# Altium PCB mada7.PcbDoc (part 1 of 3)
Units mil, origin at the board's own origin, x right, y up, seen from the top; angles counter-clockwise.
Board outline 3925 x 3925 mil, 2 copper layers (TopLayer, BottomLayer); 71 components, 72 nets, 888 pads, 9 vias.
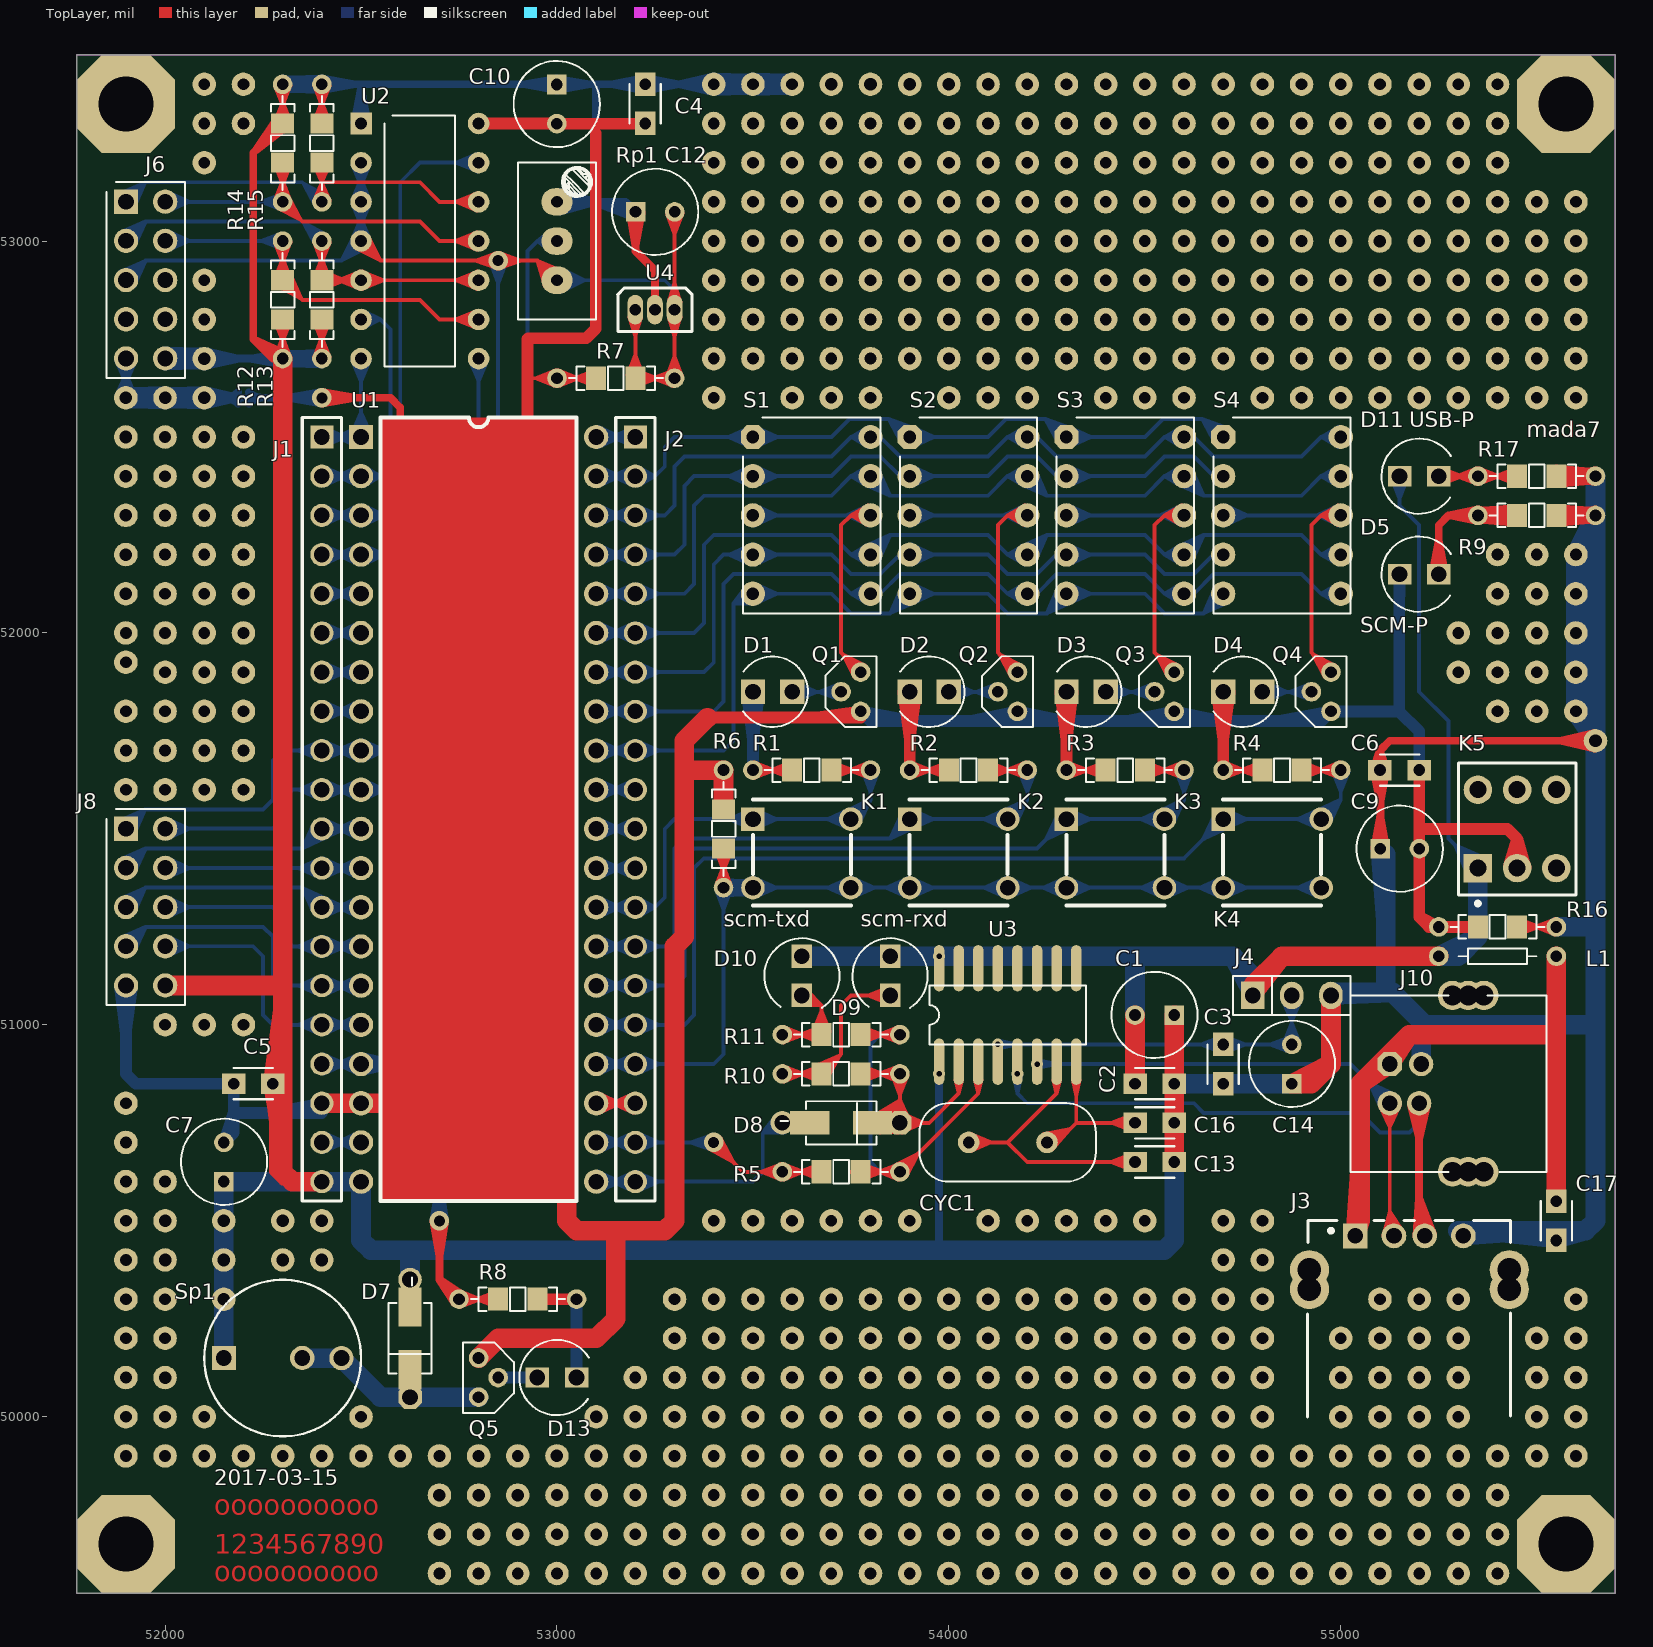
[diagram p0: TopLayer view]
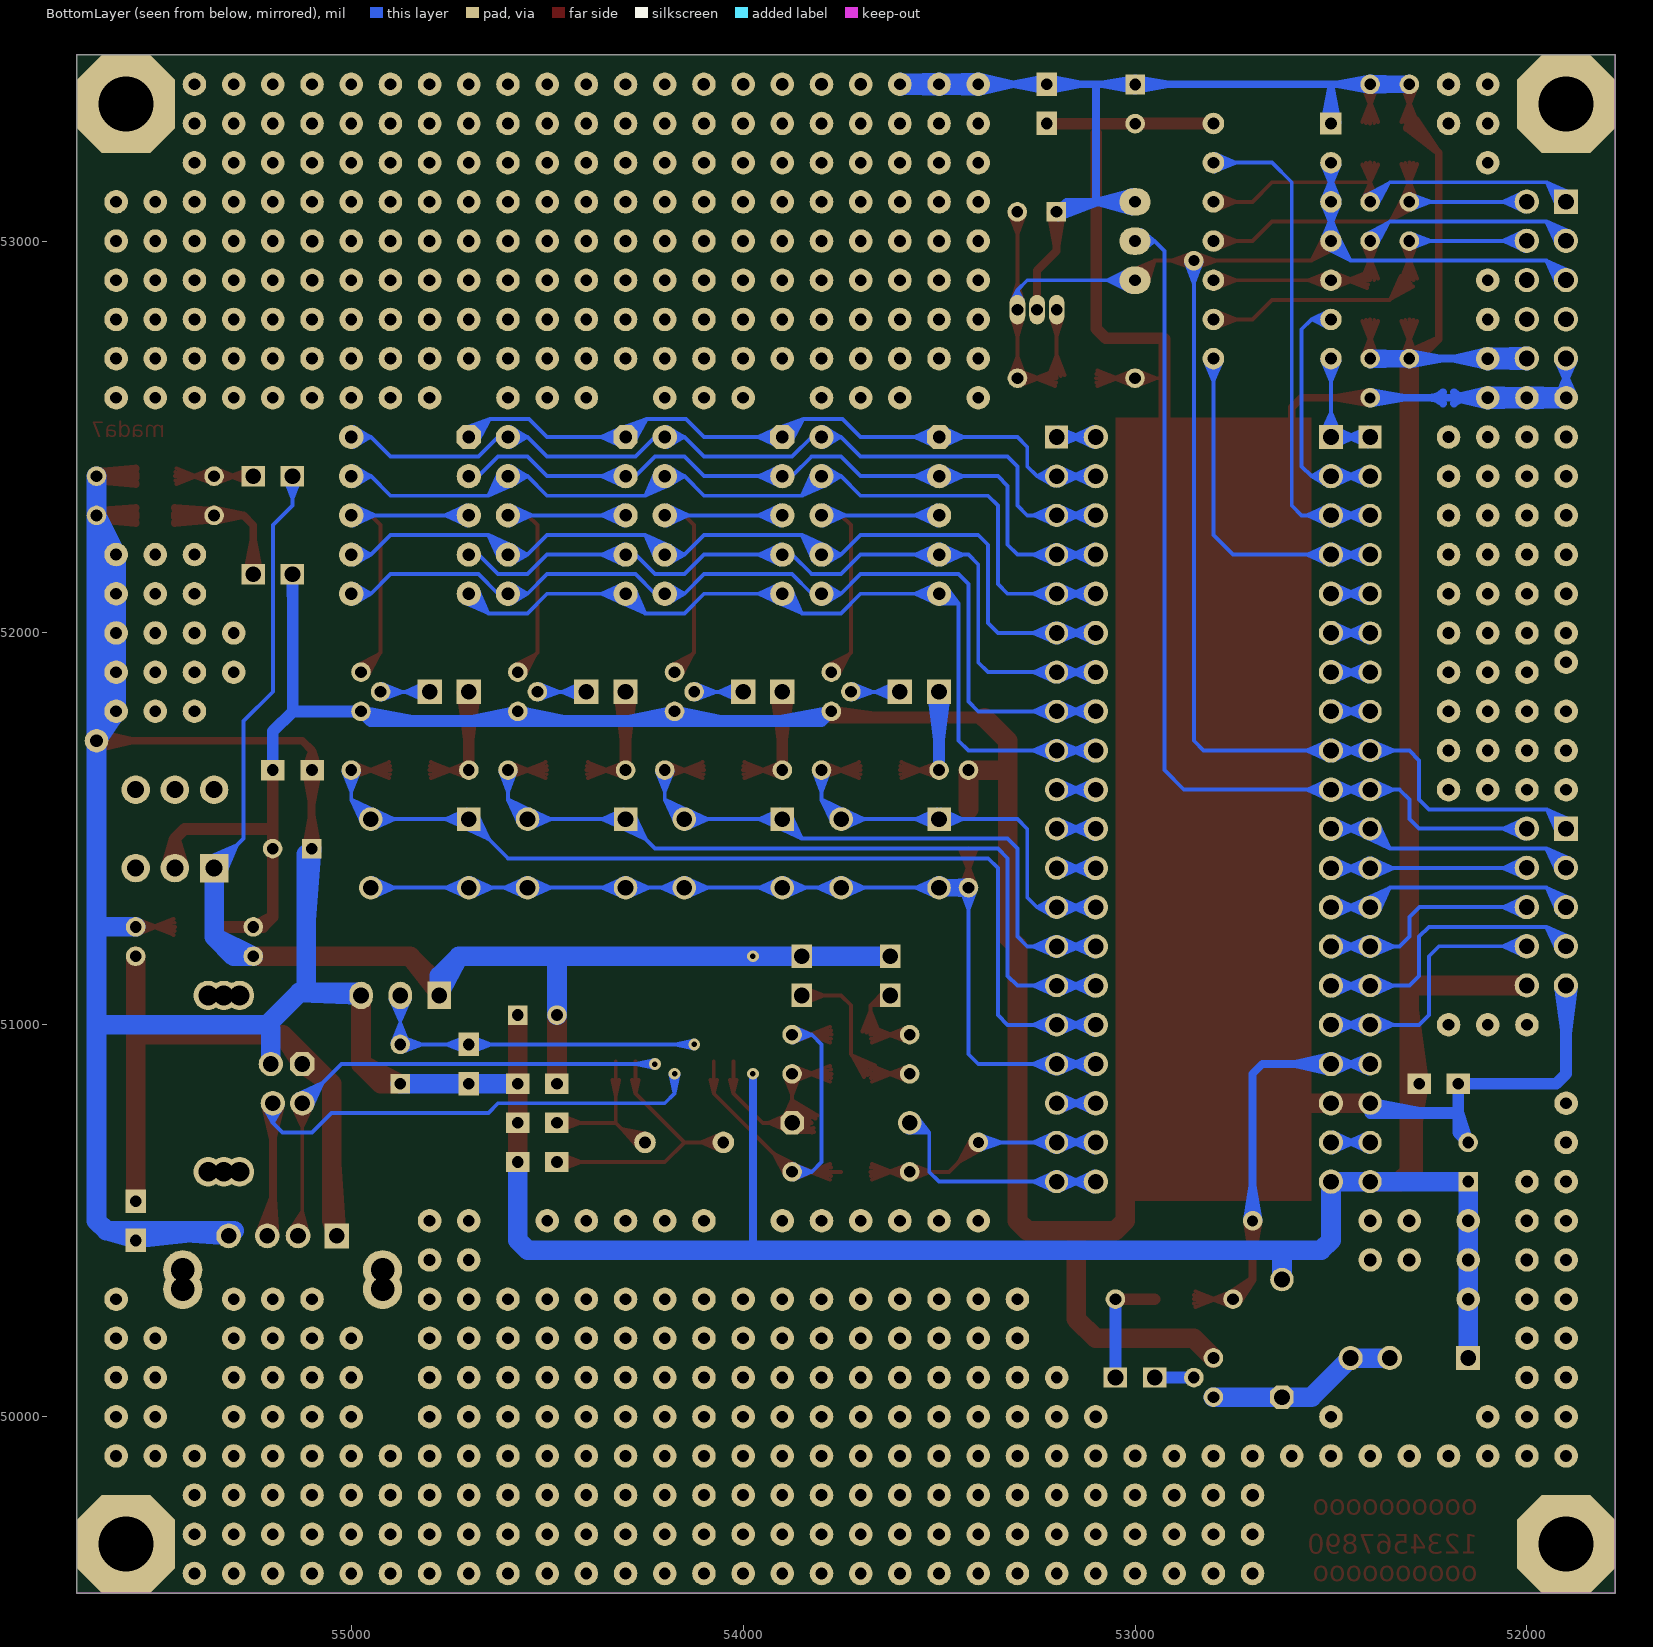
[diagram p1: BottomLayer view, seen from below]

## Layer stack, top to bottom
TopLayer: signal copper 1.4
Dielectric: dielectric 12.6, FR-4, Dk 4.8
BottomLayer: signal copper 1.4

## Board outline
51775,53475 55700,53475 55700,49550 51775,49550

## Design rules (kind name [scope] priority, off if disabled: settings)
AssemblyTestPointUsage [All] p1 off:
AssemblyTestpoint [All] p1 off: testpointundercomponent=TRUE minsize=40 maxsize=100 preferedsize=60 minholesize=0 maxholesize=40 preferedholesize=32 testpointgrid=1 usegrid=TRUE gridtolerance=0.01 allowsidetop=TRUE allowsidebottom=TRUE
Clearance [All] p1: gap=10
ComponentClearance [All] p1 off: gap=10 collisioncheckmode=3 verticalgap=10 showdistances=FALSE
FabricationTestPointUsage TestPointUsage [All] p1 off: valid=0 allowmultiple=FALSE
FabricationTestpoint Testpoint [All] p1 off: side=3 testpointundercomponent=TRUE minsize=40 maxsize=100 preferedsize=60 minholesize=20 maxholesize=40 preferedholesize=32 testpointgrid=1 allowsidetop=TRUE allowsidebottom=TRUE usegrid=TRUE gridtolerance=0.01
Height [All] p1 off: minheight=0 maxheight=1000 prefheight=500
HoleToHoleClearance [All] p1 off: gap=10 allowstackedmicrovias=TRUE
LayerPairs [All] p1 off: enforce=TRUE
MinimumSolderMaskSliver [All] p1 off: minsoldermaskwidth=10
NetAntennae [All] p1 off: netantennaetolerance=0
PasteMaskExpansion [All] p1 off: expansion=0
PlaneClearance [All] p1 off: clearance=20
PlaneConnect [All] p1 off: planeconnectstyle=Relief reliefexpansion=20 reliefentries=4 reliefconductorwidth=10 reliefairgap=10
PolygonConnect [All] p1 off: connectstyle=Relief reliefconductorwidth=10 reliefentries=4 polygonreliefangle="90 Angle"
RoutingVias [All] p1: holewidth=28 width=50 viastyle="Through Hole" minholewidth=28 minwidth=50 maxholewidth=28 maxwidth=50
SilkToSilkClearance [All] p1 off: silktosilkclearance=10
SilkscreenOverComponentPads [All] p1 off: minsilkscreentomaskgap=10
SolderMaskExpansion [All] p1 off: expansion=4
Width [All] p1: maxlimit=100 minlimit=10 preferedwidth=10
Width Width_1 [All] p2 off: maxlimit=100 minlimit=10 preferedwidth=50
Width Width_2 [All] p3 off: maxlimit=100 minlimit=10 preferedwidth=30
13 further rules are at their usual default settings.

## Components (designator, comment, footprint, x,y, rotation, side; value= is the part's Value field where it differs from the comment)
C1 "100u/16v" rb.1/.2#1 54525,51025 r0 top
C2 "CAP" cap010805 54475,50850 r0 top
C3 "103" cap010805 54700,50950 r270 top
C4 "104" cap010805 53225,53300 r90 top
C5 "104" cap010805 52175,50850 r0 top
C6 "104" cap010805 55200,51650 r180 top
C7 "10u/16v" rb.1/.2#1 52150,50650 r270 top
C9 "100u/16v" rb.1/.2#2 55150,51450 r180 top
C10 "10u/16v" rb.1/.2#2 53000,53350 r90 top
C12 "10u" rb.1/.2#2 53250,53075 r180 top
C13 "104" cap010805 54475,50650 r0 top
C14 "10u/16v" rb.1/.2#1 54875,50900 r270 top
C16 "" cap010805 54475,50750 r0 top
C17 "104" cap010805 55550,50550 r270 top
CYC1 "12Mhz" cyc-rad 54250,50700 r180 top
D1 "LED" led-3 53550,51850 r180 top
D2 "LED" led-3 53950,51850 r180 top
D3 "LED" led-3 54350,51850 r180 top
D4 "LED" led-3 54750,51850 r180 top
D5 "LED" led30805 55200,52150 r0 top
D7 "sma03" smc03 52625,50050 r90 top
D8 "sma03" smc03 53875,50750 r180 top
D9 "LED" led30805 53850,51125 r270 top
D10 "LED" led30805 53625,51125 r270 top
D11 "LED" led30805 55200,52400 r0 top
D13 "LED" led30805 53000,50100 r0 top
J1 "Header 20" HDR1X20 52400,52500 r270 top
J2 "Header 20" HDR1X20 53200,52500 r270 top
J3 "USB-a" usb-a 55175,50350 r270 top
J4 "Header 20" SIP3 54875,51075 r0 top
J6 "CON10" idc10 51900,53100 r270 top
J8 "CON10" idc10 51900,51500 r270 top
J10 "" USB_b 55125,50900 r90 top
K1 "6-6-5" pb1 53500,51525 r0 top
K2 "6-6-5" pb1 53900,51525 r0 top
K3 "6-6-5" pb1 54300,51525 r0 top
K4 "6-6-5" pb1 54700,51525 r0 top
K5 "SW-DPDT" DPDT-6 55450,51500 r90 top
L1 "Res2" axial0.3 55550,51175 r180 top
Q1 "8550" to-92a 53775,51800 r90 top
Q2 "8550" to-92a 54175,51800 r90 top
Q3 "8550" to-92a 54575,51800 r90 top
Q4 "8550" to-92a 54975,51800 r90 top
Q5 "8550" to-92a 52800,50150 r270 top
R1 "Res22" a030805 53800,51650 r180 top
R2 "Res22" a030805 54200,51650 r180 top
R3 "Res22" a030805 54600,51650 r180 top
R4 "Res22" a030805 55000,51650 r180 top
R5 "Res22" a030805 53875,50625 r180 top
R6 "Res22" a030805 53425,51350 r90 top
R7 "Res22" a030805 53300,52650 r180 top
R8 "Res22" a030805 53050,50300 r180 top
R9 "Res22" a030805 55650,52300 r180 top
R10 "Res22" a030805 53875,50875 r180 top
R11 "Res22" a030805 53875,50975 r180 top
R12 "Res22" a030805 52300,52700 r90 top
R13 "Res22" a030805 52400,52700 r90 top
R14 "Res22" a030805 52300,53400 r270 top
R15 "Res22" a030805 52400,53400 r270 top
R16 "Res22" a030805 55250,51250 r0 top
R17 "Res22" a030805 55650,52400 r180 top
Rp1 "10k" VR3296-1 53000,53000 r90 top
S1 "3911BH" LED10s 53500,52500 r0 top
S2 "3911BH" LED10s 53900,52500 r0 top
S3 "3911BH" LED10s 54300,52500 r0 top
S4 "3911BH" LED10s 54700,52500 r0 top
Sp1 "SPEAKER" sp0.23 52150,50150 r0 top
U1 "单片机IAP15F2K61S2" DIP40 52500,52500 r0 top
U2 "TLC5620" dip14 52500,53300 r0 top
U3 "CH340G" SOP-16 53950,51025 r0 top
U4 "TL431AILP" BCY-W3/B.8 53250,52825 r270 top

## Footprints (in the part's own frame and the unit in brackets; to place one, negate y for a bottom-side part, rotate by r counter-clockwise, add the part's x,y. Pads: shape width x height; smd on the part's side, far side on the other; paste and mask are expansions set on the pad)
a030805 [mm]
  round 1.27 hole 0.762: 1(0,0) 2(7.62,0)
  rect 1.3x1.5 smd: 3(2.54,0) 4(5.08,0)
  silkscreen extent 0.76,-0.76 6.86,0.76
axial0.3 [mil]
  round 50 hole 30: 1(0,0) 2(300,0)
  silkscreen extent 50,-20 250,20
BCY-W3/B.8 [mil] "TO, Flat Index; 3 In-Line, Axial Leads; Body Dia. 4.6mm; Lead Dia. 0.5 mm (max)"
  oval 75x40 hole 30: 1(0,-50) 2(0,0) 3(0,50)
  silkscreen extent -56,-95 56,95
cap010805 [mil] "0.1&0805"
  rect 60x52 hole 30: 1(0,0) 2(100,0)
  silkscreen extent 0,-40 100,40
cyc-rad [mil]
  round 55 hole 30: 1(-0.45,-0.07) 2(199.55,-0.07)
  silkscreen extent -125,-100 325,100
dip14 [mil]
  rect 55x55 hole 30: 1(0,0)
  round 55 hole 30: 2(0,-100) 3(0,-200) 4(0,-300) 5(0,-400) 6(0,-500) 7(0,-600) 8(300,-600) 9(300,-500) 10(300,-400) 11(300,-300) 12(300,-200) 13(300,-100) 14(300,0)
  silkscreen extent 60,-620 240,20
DIP40 [mil]
  rect 62x62 hole 40: 1(0,0)
  round 62 hole 40: 2(0,-100) 3(0,-200) 4(0,-300) 5(0,-400) 6(0,-500) 7(0,-600) 8(0,-700) 9(0,-800) 10(0,-900) 11(0,-1000) 12(0,-1100) 13(0,-1200) 14(0,-1300) 15(0,-1400) 16(0,-1500) 17(0,-1600) 18(0,-1700) 19(0,-1800) 20(0,-1900) 21(600,-1900) 22(600,-1800) 23(600,-1700) 24(600,-1600) 25(600,-1500) 26(600,-1400) 27(600,-1300) 28(600,-1200) 29(600,-1100) 30(600,-1000) 31(600,-900) 32(600,-800) 33(600,-700) 34(600,-600) 35(600,-500) 36(600,-400) 37(600,-300) 38(600,-200) 39(600,-100) 40(600,0)
  silkscreen extent 50,-1950 550,50
DPDT-6 [mm] "Double-Pole, Double-Throw Switch; 6 Leads"
  rect 1.85x1.85 hole 1.1: 1(-2.54,2.54)
  round 1.85 hole 1.1: 2(-2.54,0) 3(-2.54,-2.54) 4(2.54,-2.54) 5(2.54,0) 6(2.54,2.54)
  silkscreen extent -4.96,-3.81 4.28,3.81
HDR1X20 [mm] "Connector; Header; 20 Position"
  rect 1.5x1.5 hole 1.016: 1(0,0)
  round 1.5 hole 1.016: 2(2.54,0) 3(5.08,0) 4(7.62,0) 5(10.16,0) 6(12.7,0) 7(15.24,0) 8(17.78,0) 9(20.32,0) 10(22.86,0) 11(25.4,0) 12(27.94,0) 13(30.48,0) 14(33.02,0) 15(35.56,0) 16(38.1,0) 17(40.64,0) 18(43.18,0) 19(45.72,0) 20(48.26,0)
  silkscreen extent -1.27,-1.27 49.53,1.27
idc10 [mil]
  rect 62x62 hole 40: 1(-0.5,0.29)
  round 62 hole 40: 2(-0.5,100.29) 3(99.5,0.29) 4(99.5,100.29) 5(199.5,0.29) 6(199.5,100.29) 7(299.5,0.29) 8(299.5,100.29) 9(399.5,0.29) 10(399.5,100.29)
  silkscreen extent -51,-50 450,150
LED10s [mil]
  oct 62x62 hole 32: 1(0,0)
  round 62 hole 32: 2(0,-100) 3(0,-200) 4(0,-300) 5(0,-400) 6(300,-400) 7(300,-300) 8(300,-200) 9(300,-100) 10(300,0)
  silkscreen extent -25,-450 325,50
led30805 [mil]
  rect 60x52 hole 40: 1(-50,0) 2(50,0)
  silkscreen extent -96,-96 81,96
led-3 [mil]
  rect 62x62 hole 40: 1(-50,0) 2(50,0)
  silkscreen extent -90,-90 75,90
pb1 [mil]
  rect 60x60 hole 40: 1(0,0)
  round 60 hole 40: 2(0,-175) 3(250,-175) 4(250,0)
  silkscreen extent 0,-220 250,50
rb.1/.2#1 [mil] "0.1&0805"
  rect 50x50 hole 30: 1(50,0)
  round 50 hole 30: 2(-50,0)
  silkscreen extent -110,-110 110,110
rb.1/.2#2 [mil]
  rect 50x50 hole 30: 1(49.5,0.46)
  round 50 hole 30: 2(-50.5,0.46)
  silkscreen extent -110,-110 109,110
SIP3 [mil]
  rect 60x70 hole 40: 1(-100,0)
  oval 60x70 hole 40: 2(0,0) 3(100,0)
  silkscreen extent -150,-50 150,50
smc03 [mil]
  oct 60x60 hole 40: 1(0,0)
  round 60 hole 40: 2(300,0)
  rect 100x59.06 smd: 3(70,0) 4(230,0)
  silkscreen extent 60,-55 305,55
SOP-16 [mil] "Small Outline; 16 Leads; Body Width 5.6 mm; Pitch 1.27 mm"
  oval 27x118 smd: 1(25,-119) 2(75,-119) 3(125,-119) 4(175,-119) 5(225,-119) 6(275,-119) 7(325,-119) 8(375,-119) 9(375,119.5) 10(325,119.5) 11(275,119.5) 12(225,119.5) 13(175,119.5) 14(125,119.5) 15(75,119.5) 16(25,119.5)
  silkscreen extent 0,-75 400,75
sp0.23 [mil] "speak sip2-sip3"
  rect 62x62 hole 40: 1(0.09,-0.33)
  round 62 hole 40: 2(200,0) 3(300.09,-0.33)
  silkscreen extent -50,-200 350,200
to-92a [mil]
  round 50 hole 30: 1(0,0) 2(50,50) 3(100,0)
  silkscreen extent -39,-40 141,90
usb-a [mm] "Connector; USB, Type A"
  rect 1.6x1.6 hole 1.016: 1(-2.83,-3.5)
  round 1.6 hole 1.016: 2(-2.83,-1) 3(-2.83,1) 4(-2.83,3.5)
  round 2.54 hole 1.524: 5(-0.635,6.477) 5(0.635,6.477) 6(-0.635,-6.477) 6(0.635,-6.477)
  silkscreen extent -3.84,-6.6 8.89,6.57
USB_b [mil]
  oct 62x62 hole 40: 1(0,0)
  round 62 hole 40: 2(-100,0) 3(-100,-75) 4(0,-80)
  round 75 hole 50: 5(-275,-240) 5(-275,-200) 5(-275,-160) 6(175,-200) 6(175,-160) 6(175,-240)
  silkscreen extent -275,-400 175,100
VR3296-1 [mil]
  oval 70x80 hole 30: 1(-100,0) 2(0,0) 3(100,0)
  silkscreen extent -200,-100 200,100

## Part data
C1 C7 C9 C10 C12 C14: library part ELECTRO1, "Electrolytic Capacitor"
C2: "Capacitor"
C3 C4 C5 C6 C17: library part CAP, "Capacitor"
C13 C16: library part CAP
CYC1: library part CRYSTAL, "Crystal"
J1 J2: "Header, 20-Pin"
J3 J10: library part CON4, "Connector"
J4: library part CON3, "Connector"
J6 J8: "Connector"
K1 K2 K3 K4: library part SW-PB2
K5: "Double-Pole, Double-Throw Switch"
L1 R1 R2 R3 R4 R5 R6 R7 R8 R9 R10 R11 R12 R13 R14 R15 R16 R17: "Resistor"
Q1 Q2 Q3 Q4 Q5: library part PNP
Rp1: library part POT2
S1 S2 S3 S4: library part DS1
Sp1: "SPEAKER sip0.2/0.3"
U1: library part Component_3
U4: "Programmable Precision Reference"

## Free pads (board coordinates)
  round 60 hole 30: 0(52100,53400) 0(53400,53400) 0(54600,50300) 0(55600,52100) 1(53500,53400) 1(54700,50300) 1(55300,49800) 1(55600,52000) 2(52000,50600) 2(52000,52200) 2(52000,52300) 2(52000,52400) 2(53400,53200) 2(53500,53200) 2(53600,53200) 2(53600,53400) 2(54300,53100) 2(54300,53200) 2(54300,53300) 2(54700,50400) 2(54900,53100) 2(54900,53200) 2(54900,53300) 2(55000,52900) 2(55000,53000) 2(55300,49700) 2(55600,51900) 3(52100,52200) 3(52100,52300) 3(52100,52400) 3(52700,49600) 3(52700,49700) 3(53200,50100) 3(53400,53300) 3(53500,53300) 3(53600,53300) 3(54200,53100) 3(54200,53200) 3(54200,53300) 3(54700,50500) 3(54800,53100) 3(54800,53200) 3(54800,53300) 3(54900,52900) 3(54900,53000) 3(55300,49600) 3(55600,51800) 4(51900,49900) 4(51900,50000) 4(52200,52200) 4(52200,52300) 4(52200,52400) 4(52800,49600) 4(52800,49700) 4(53300,50300) 4(53500,52800) 4(54100,53100) 4(54100,53200) 4(54100,53300) 4(54700,53100) 4(54700,53200) 4(54700,53300) 4(54800,52900) 4(54800,53000) 4(55400,49600) 4(55600,52200) 5(52900,49600) 5(52900,49700) 5(53400,50300) 5(53600,52800) 5(54000,53100) 5(54000,53200) 5(54000,53300) 5(54700,52900) 5(54700,53000) 5(55400,49700) 5(55500,52200) 6(53000,49600) 6(53000,49700) 6(53000,49800) 6(53600,52700) 6(53900,50300) 6(53900,53100) 6(53900,53200) 6(53900,53300) 6(54600,52900) 6(54600,53000) 6(55400,49800) 6(55400,52200) 7(53100,49600) 7(53100,49700) 7(53100,49800) 7(53500,52700) 7(53800,53100) 7(53800,53200) 7(53800,53300) 7(54500,52900) 7(54500,53000) 7(54800,50500) 7(55300,52000) 8(52000,50200) 8(52000,50300) 8(52100,53300) 8(53200,49600) 8(53200,49700) 8(53200,49800) 8(53300,50200) 8(53700,53100) 8(53700,53200) 8(53700,53300) 8(54400,52900) 8(54400,53000) 8(54800,50400) 8(55300,51900) 9(51900,50400) 9(51900,50500) 9(52100,53200) 9(53300,49600) 9(53300,49700) 9(53300,49800) 9(53400,50200) 9(54300,52900) 9(54300,53000) 9(54800,50300) 9(55000,50200) 10(52000,51000) 10(53400,49600) 10(53400,49700) 10(53400,49800) 10(53500,50200) 10(53500,50300) 10(54200,52900) 10(54200,53000) 10(54800,50200) 10(55000,50100) 11(52100,49900) 11(52100,50000) 11(52100,51000) 11(53500,49600) 11(53500,49700) 11(53500,49800) 11(53600,50200) 11(53600,50300) 11(54100,52900) 11(54100,53000) 11(54700,50200) 11(55000,50000) 12(52200,49900) 12(52200,51000) 12(53600,49600) 12(53600,49700) 12(53600,49800) 12(53600,52600) 12(53700,50200) 12(53700,50300) 12(54000,52900) 12(54000,53000) 12(54600,50200) 12(55100,50000) 13(52300,49900) 13(52600,49900) 13(53700,49600) 13(53700,49700) 13(53700,49800) 13(53800,50200) 13(53800,50300) 13(53900,52900) 13(53900,53000) 13(54200,53400) 13(54600,50100) 13(55200,50000) 14(52400,49900) 14(53400,52700) 14(53800,49600) 14(53800,49700) 14(53800,49800) 14(53800,52900) 14(53800,53000) 14(53900,50200) 14(54300,53400) 14(54700,50100) 14(55300,50000) 15(52500,49900) 15(53200,49900) 15(53200,50000) 15(53700,52900) 15(53700,53000) 15(53900,49600) 15(53900,49700) 15(53900,49800) 15(54000,50200) 15(54000,50300) 15(54400,53400) 15(54800,50100) 15(55300,50100) 16(53300,49900) 16(53300,50000) 16(53300,50100) 16(53400,52600) 16(54000,49600) 16(54000,49700) 16(54000,49800) 16(54100,50200) 16(54100,50300) 16(54500,53400) 16(54800,50000) 16(55300,50200) 17(52700,49900) 17(52900,49900) 17(53400,49900) 17(53400,50000) 17(53400,50100) 17(53400,52900) 17(54100,49600) 17(54100,49700) 17(54100,49800) 17(54200,50200) 17(54200,50300) 17(54600,53400) 17(54700,50000) 17(55300,50300) 18(52500,50000) 18(52800,49900) 18(53400,52800) 18(53500,49900) 18(53500,50000) 18(53500,50100) 18(54200,49600) 18(54200,49700) 18(54200,49800) 18(54300,50200) 18(54300,50300) 18(54600,50000) 18(54700,53400) 18(55200,50300) 19(53600,49900) 19(53600,50000) 19(53600,50100) 19(53700,52600) 19(53700,52700) 19(53700,52800) 19(54300,49600) 19(54300,49700) 19(54300,49800) 19(54400,50200) 19(54400,50300) 19(54700,49900) 19(54800,53400) 19(55100,50300) 20(53700,49900) 20(53700,50000) 20(53700,50100) 20(53800,52600) 20(53800,52700) 20(53800,52800) 20(54400,49600) 20(54400,49700) 20(54400,49800) 20(54500,50200) 20(54500,50300) 20(54800,49900) 20(54900,53400) 20(55100,50200) 21(53800,49900) 21(53800,50000) 21(53800,50100) 21(53900,52700) 21(53900,52800) 21(54500,49600) 21(54500,49700) 21(54500,49800) 21(54900,49900) 21(55000,53400) 21(55200,50200) 22(53900,49900) 22(53900,50000) 22(53900,50100) 22(54000,52600) 22(54000,52700) 22(54000,52800) 22(54600,49600) 22(54600,49700) 22(54600,49800) 22(55000,49900) 22(55100,53400) 22(55200,50100) 23(54000,49900) 23(54000,50000) 23(54000,50100) 23(54100,52600) 23(54100,52700) 23(54100,52800) 23(54700,49600) 23(54700,49700) 23(54700,49800) 23(55100,49900) 23(55100,50100) 23(55200,53400) 24(54100,49900) 24(54100,50000) 24(54100,50100) 24(54200,52600) 24(54200,52700) 24(54200,52800) 24(54800,49600) 24(54800,49700) 24(54800,49800) 24(55200,49900) 24(55300,53400) 25(54200,49900) 25(54200,50000) 25(54200,50100) 25(54300,52700) 25(54300,52800) 25(54900,49600) 25(54900,49700) 25(54900,49800) 25(55300,49900) 25(55400,53400) 26(54300,49900) 26(54300,50000) 26(54300,50100) 26(54400,52600) 26(54400,52700) 26(54400,52800) 26(55000,49600) 26(55000,49700) 26(55000,49800) 26(55400,49900) 26(55400,53300) 27(54400,49900) 27(54400,50000) 27(54400,50100) 27(54500,50500) 27(54500,52600) 27(54500,52700) 27(54500,52800) 27(55100,49600) 27(55100,49700) 27(55100,49800) 27(55400,53200) 28(54400,50500) 28(54500,49900) 28(54500,50000) 28(54500,50100) 28(54600,52600) 28(54600,52700) 28(54600,52800) 28(55200,49600) 28(55200,49700) 28(55200,49800) 28(55500,53100) 29(54300,50500) 29(54600,49900) 29(54700,52700) 29(54700,52800) 29(55600,53100) 30(54200,50500) 30(54800,52600) 30(54800,52700) 30(54800,52800) 30(55400,53100) 31(54100,50500) 31(54900,52600) 31(54900,52700) 31(54900,52800) 31(55300,53100) 32(53900,50500) 32(55000,52600) 32(55000,52700) 32(55000,52800) 32(55300,53200) 33(53800,50500) 33(55100,52600) 33(55100,52700) 33(55100,52800) 33(55300,53300) 34(53700,50500) 34(55200,52600) 34(55200,52700) 34(55200,52800) 34(55200,53300) 35(53600,50500) 35(55200,53200) 35(55300,52600) 35(55300,52700) 35(55300,52800) 36(52000,50100) 36(52000,52100) 36(52200,52500) 36(53500,50500) 36(54600,53100) 36(55200,53100) 36(55400,53000) 37(52000,50000) 37(52000,52000) 37(52100,52500) 37(53400,50500) 37(53500,52900) 37(54600,53200) 37(55200,53000) 37(55400,52900) 38(51900,50200) 38(52100,52000) 38(53500,53000) 38(54500,53200) 38(55100,53200) 38(55200,52900) 38(55500,49900) 38(55500,52900) 39(51900,50300) 39(52100,52100) 39(53400,53000) 39(54500,53100) 39(55100,53100) 39(55300,52900) 39(55500,53000) 39(55600,49900) 40(52200,52100) 40(53400,53100) 40(54400,53100) 40(55000,53100) 40(55300,53000) 40(55600,50000) 40(55600,53000) 41(52200,52000) 41(53500,53100) 41(54400,53200) 41(55000,53200) 41(55500,50000) 41(55600,52900) 42(52200,51900) 42(52200,53400) 42(53600,53100) 42(54400,53300) 42(55000,53300) 42(55500,50100) 42(55600,52800) 43(51900,50100) 43(52100,51900) 43(52200,53300) 43(53600,53000) 43(54500,53300) 43(55100,53300) 43(55500,50200) 43(55500,52800) 44(52000,49900) 44(52000,51900) 44(52000,52500) 44(53600,52900) 44(54600,53300) 44(55400,52800) 44(55600,50200) 45(55600,50100) 46(55600,50300) 47(52100,52900) 50(52100,52800) 51(51900,52000) 52(51900,51925) 53(51900,51800) 54(51900,51700) 55(51900,51600) 56(52000,51600) 57(52000,51700) 58(52000,51800) 59(52100,51800) 60(52200,51800) 61(52200,51700) 62(52200,51600) 63(52100,51600) 64(52100,51700) 65(55400,52600) 66(55500,52600) 67(55600,52600) 68(55600,52700) 69(55500,52700) 70(55400,52700) 77(55500,51800) 78(55400,51800) 79(55400,51900) 80(55400,52000) 81(55500,52000) 82(55500,52100) 83(55400,52100) 85(55500,51900) 86(51900,50600) 87(51900,50700) 88(51900,50800)
  round 60 hole 32: 0(55100,52900) 0(55650,51725) 2(52000,50100) 2(52300,50500) 3(52400,50500) 3(55100,53000) 4(52400,50400) 5(52300,50400) 8(52000,50500) 10(52150,50500) 11(52150,50400) 12(52150,50300) 13(53700,53400) 14(51900,52500) 15(51900,52400) 16(52100,52600) 16(53800,53400) 17(52000,52600) 17(53900,53400) 18(51900,52300) 18(51900,52600) 19(51900,52200) 19(52100,52700) 20(54000,53400) 21(54100,53400) 22(51900,52100) 30(53100,50000) 31(52800,49800) 32(52900,49800) 33(53000,49900) 34(53100,49900) 35(52000,50400) 36(52700,49800)
  oct 250x250 hole 140: 1(51900,53350) 2(51900,49675) 3(55575,49675) 4(55575,53350)

## Via types
v1: diameter 30, hole 14, TopLayer to BottomLayer, 5 vias
v2: diameter 50, hole 28, TopLayer to BottomLayer, 4 vias

## Nets (pads, with @x,y where several pads share a name; then routed paths per layer and width w, separated by ;. In a path a pad name is that pad's centre, name@x,y a point inside that pad or via, vN(x,y) a via of type N, cw(c..) or ccw(c..) an arc to the next point about the centre after c; other vN are vias at no path point)
DACA: J6.1 R15.2 R15.4 U2.12 | length 2373.1
  TopLayer w10: R15.4@52379.85,53195.76 52400,53150 ; R15.2@52380.4,53104 52400,53150 ; R15.4@52389.47,53198.88 52400,53150 ; R15.2@52390.05,53101 52400,53150 ; R15.2@52400,53100 52400,53150 ; R15.4@52400,53200 52400,53150 ; R15.2@52409.95,53101 52400,53150 ; R15.4@52410.53,53198.88 52400,53150 ; R15.2@52419.6,53104 52400,53150 ; R15.4@52420.15,53195.76 52400,53150 ; U2.12@52795.6,53077.93 52742.5,53100 ; U2.12@52795.6,53122.07 52742.5,53100 ; U2.12@52798.64,53087.57 52742.5,53100 ; U2.12@52798.64,53112.43 52742.5,53100 ; U2.12@52800,53100 52700,53100 52650,53150 52400,53150
  BottomLayer w10: J6.1@51885.64,53121.98 51949.79,53150 ; J6.1@51890.34,53113.03 51949.79,53150 ; J6.1@51896.23,53104.92 51949.79,53150 ; J6.1@51900.29,53100.5 51949.79,53150 ; J6.1@51904.71,53096.44 51949.79,53150 ; J6.1@51912.82,53090.55 51949.79,53150 ; J6.1@51921.77,53085.85 51949.79,53150 ; R15.2@52383.86,53088.19 52353.79,53146.21 ; R15.2@52392.41,53093.49 52353.79,53146.21 ; R15.2@52400,53100 52350,53150 51949.79,53150 ; R15.2@52406.51,53107.59 52353.79,53146.21 ; R15.2@52411.81,53116.14 52353.79,53146.21
DACB: J6.2 R14.2 R14.4 U2.11 | length 2577
  TopLayer w10: R14.4@52279.77,53196.19 52300,53144.41 ; R14.2@52280.33,53103.64 52300,53155 ; R14.2@52288.19,53083.86 52346.21,53053.79 ; R14.4@52289.46,53198.99 52300,53144.41 ; R14.2@52290.04,53100.91 52300,53155 ; R14.2@52293.49,53092.41 52346.21,53053.79 ; R14.2@52307.59,53106.51 52346.21,53053.79 ; R14.2@52309.96,53100.91 52300,53155 ; R14.4@52310.54,53198.99 52300,53144.41 ; R14.2@52316.14,53111.81 52346.21,53053.79 ; R14.2@52319.67,53103.64 52300,53155 ; R14.4@52320.23,53196.19 52300,53144.41 ; U2.11@52795.6,52977.93 52742.5,53000 ; U2.11@52795.6,53022.07 52742.5,53000 ; U2.11@52798.64,52987.57 52742.5,53000 ; U2.11@52798.64,53012.43 52742.5,53000 ; U2.11@52800,53000 52700,53000 52650,53050 52350,53050 R14.2@52300,53100 R14.4@52300,53200 52300,53144.41
  BottomLayer w10: J6.2@52000.29,53100.5 52061.29,53100 ; J6.2@52000.53,53094.5 52061.29,53100 ; J6.2@52000.63,53106.49 52061.29,53100 ; J6.2@52000.79,53100 R14.2@52300,53100 ; J6.2@52002.26,53084.62 52061.29,53100 ; J6.2@52002.52,53116.34 52061.29,53100 ; J6.2@52005.62,53075.05 52061.29,53100 ; J6.2@52006.04,53125.86 52061.29,53100 ; R14.2@52296.36,53080.33 52245,53100 ; R14.2@52296.36,53119.67 52245,53100 ; R14.2@52299.09,53090.04 52245,53100 ; R14.2@52299.09,53109.96 52245,53100
DACC: J6.3 R13.2 R13.4 U2.5 U2.10 | length 3203.5
  TopLayer w10: R13.4@52379.77,52903.81 52400,52955.59 ; R13.2@52380.33,52996.36 52400,52945 ; R13.4@52389.46,52901.01 52400,52955.59 ; R13.2@52390.04,52999.09 52400,52945 ; R13.2@52400,53000 R13.4@52400,52900 U2.5@52500,52900 U2.10@52800,52900 ; R13.4@52403.94,52900 52459.53,52900 ; R13.4@52404.95,52889.46 52459.53,52900 ; R13.4@52404.95,52910.54 52459.53,52900 ; R13.4@52407.75,52879.77 52459.53,52900 ; R13.4@52407.75,52920.23 52459.53,52900 ; R13.2@52409.96,52999.09 52400,52945 ; R13.4@52410.54,52901.01 52400,52955.59 ; R13.2@52419.67,52996.36 52400,52945 ; R13.4@52420.23,52903.81 52400,52955.59 ; U2.5@52495.6,52877.93 52442.5,52900 ; U2.5@52495.6,52922.07 52442.5,52900 ; U2.5@52498.64,52887.57 52442.5,52900 ; U2.5@52498.64,52912.43 52442.5,52900 ; U2.5@52501.36,52887.57 52557.5,52900 ; U2.5@52501.36,52912.43 52557.5,52900 ; U2.5@52504.4,52877.93 52557.5,52900 ; U2.5@52504.4,52922.07 52557.5,52900 ; U2.10@52795.6,52877.93 52742.5,52900 ; U2.10@52795.6,52922.07 52742.5,52900 ; U2.10@52798.64,52887.57 52742.5,52900 ; U2.10@52798.64,52912.43 52742.5,52900
  BottomLayer w10: J6.3@51885.67,53022 51950,53050 ; J6.3@51890.36,53013.05 51950,53050 ; J6.3@51896.24,53004.93 51950,53050 ; J6.3@51900.29,53000.5 51950,53050 ; J6.3@51900.5,53000.5 51950,53050 ; J6.3@51904.7,52996.43 51950,53050 ; J6.3@51912.8,52990.52 51950,53050 ; J6.3@51921.73,52985.79 51950,53050 ; R13.2@52383.86,52988.19 52353.79,53046.21 ; R13.2@52392.41,52993.49 52353.79,53046.21 ; R13.2@52400,53000 52350,53050 51950,53050 ; R13.2@52406.51,53007.59 52353.79,53046.21 ; R13.2@52411.81,53016.14 52353.79,53046.21
DACD: J6.4 R12.2 R12.4 U2.9 | length 3113.7
  TopLayer w10: R12.4@52291.21,52883.81 52346.8,52853.2 ; R12.4@52296.75,52892.22 52346.8,52853.2 ; R12.4@52303.94,52900 52346.8,52853.2 ; R12.4@52312.32,52906.48 52346.8,52853.2 ; R12.4@52321.18,52911.26 52346.8,52853.2 ; U2.9@52795.6,52777.93 52742.5,52800 ; U2.9@52795.6,52822.07 52742.5,52800 ; U2.9@52798.64,52787.57 52742.5,52800 ; U2.9@52798.64,52812.43 52742.5,52800 ; U2.9@52800,52800 52700,52800 52650,52850 52350,52850 R12.4@52300,52900 ; R12.4@52300,52900 R12.2@52300,53000 R12.4@52300,52900 ; 52300,52945 52290.04,52999.09 52300,52945 ; 52300,52945 52309.96,52999.09 52300,52945 ; 52300,52945 52280.33,52996.36 52300,52945 ; 52300,52945 52319.67,52996.36 52300,52945 ; 52300,52955.59 52310.54,52901.01 52300,52955.59 ; 52300,52955.59 52289.46,52901.01 52300,52955.59 ; 52300,52955.59 52320.23,52903.81 52300,52955.59 ; 52300,52955.59 52279.77,52903.81 52300,52955.59
  BottomLayer w10: J6.4@52000.29,53000.5 R12.2@52299.5,53000.5 ; J6.4@52000.58,52994.51 52061.29,53000.5 ; J6.4@52000.58,53006.49 52061.29,53000.5 ; J6.4@52002.39,52984.64 52061.29,53000.5 ; J6.4@52002.39,53016.36 52061.29,53000.5 ; J6.4@52005.83,52975.1 52061.29,53000.5 ; J6.4@52005.83,53025.9 52061.29,53000.5 ; R12.2@52296.19,52980.37 52245,53000.5 ; R12.2@52296.54,53019.7 52245,53000.5 ; R12.2@52299,52990.05 52245,53000.5 ; R12.2@52299.18,53009.97 52245,53000.5 ; R12.2@52300,53000 52245,53000.5
GND: C1.1 C2.2 C3.2 C4.2 C5.2 C6.2 C7.1 C9.1 C10.1 C12.1 C13.2 C14.1 C16.2 C17.2 D7.2 D7.4 J1.20 J3.4 J4.3 J6.10 J8.10 J10.4 pad.0@53400,53400 pad.0@55600,52100 pad.0@55650,51725 pad.1@53500,53400 pad.1@55600,52000 pad.2@53600,53400 pad.2@55600,51900 pad.3@55600,51800 pad.4@55600,52200 pad.10@52150,50500 pad.11@52150,50400 pad.12@52150,50300 pad.19@52100,52700 R9.1 R9.3 R12.1 R12.3 R13.1 R13.3 R14.1 R14.3 R15.1 R15.3 R16.2 R16.4 R17.1 R17.3 Rp1.3 Sp1.1 U1.20 U2.1 U3.1 U4.2 | length 34463.1
  TopLayer w10: R12.3@52279.77,52796.19 52300,52744.41 ; R14.3@52279.77,53303.81 52300,53355.59 ; R12.1@52280.33,52703.64 52300,52755 ; R14.1@52280.33,53396.36 52300,53345 ; R12.3@52289.46,52798.99 52300,52744.41 ; R14.3@52289.46,53301.01 52300,53355.59 ; R12.1@52290.04,52700.91 52300,52755 ; R14.1@52290.04,53399.09 52300,53345 ; R12.1@52300,52700 R12.3@52300,52800 ; R14.3@52300,53300 R14.1@52300,53385 ; R14.1@52300,53400 52300,53345 ; R12.1@52309.96,52700.91 52300,52755 ; R14.1@52309.96,53399.09 52300,53345 ; R12.3@52310.54,52798.99 52300,52744.41 ; R14.3@52310.54,53301.01 52300,53355.59 ; R12.1@52319.67,52703.64 52300,52755 ; R14.1@52319.67,53396.36 52300,53345 ; R12.3@52320.23,52796.19 52300,52744.41 ; R14.3@52320.23,53303.81 52300,53355.59 ; R13.3@52379.77,52796.19 52400,52744.41 ; R15.3@52379.77,53303.81 52400,53355.59 ; R13.1@52380.33,52703.64 52400,52755 ; R15.1@52380.33,53396.36 52400,53345 ; R13.3@52389.46,52798.99 52400,52744.41 ; R15.3@52389.46,53301.01 52400,53355.59 ; R13.1@52390.04,52700.91 52400,52755 ; R15.1@52390.04,53399.09 52400,53345 ; R13.1@52400,52700 R13.3@52400,52800 ; R15.3@52400,53300 R15.1@52400,53400 ; R13.1@52409.96,52700.91 52400,52755 ; R15.1@52409.96,53399.09 52400,53345 ; R13.3@52410.54,52798.99 52400,52744.41 ; R15.3@52410.54,53301.01 52400,53355.59 ; R13.1@52419.67,52703.64 52400,52755 ; R15.1@52419.67,53396.36 52400,53345 ; R13.3@52420.23,52796.19 52400,52744.41 ; R15.3@52420.23,53303.81 52400,53355.59 ; R16.4@55450,51250 R16.2@55550,51250 ; R16.4@55451.01,51239.46 55505.59,51250 ; R16.4@55451.01,51260.54 55505.59,51250 ; R16.4@55453.81,51229.77 55505.59,51250 ; R16.4@55453.81,51270.23 55505.59,51250 ; R16.2@55546.36,51230.33 55495,51250 ; R16.2@55546.36,51269.67 55495,51250 ; R16.2@55549.09,51240.04 55495,51250 ; R16.2@55549.09,51259.96 55495,51250
  TopLayer w20: C5.2@52259.07,50848.51 52275,50764 C5.2@52290.93,50848.51 ; C5.2@52275,50850 52275,50625 52300,50600 52325,50600 ; R14.3@52283.86,53309.71 52231.98,53231.98 ; R12.1@52290.67,52688.25 52225,52750 ; R14.3@52296.06,53300 52231.98,53231.98 ; R14.3@52300,53300 52225,53225 52225,52750 ; R14.3@52306.48,53288.4 52231.98,53231.98 ; R12.1@52307.25,52713.13 52225,52750 ; C12.1@53185.56,53073.22 53200.5,52989.54 C12.1@53215.44,53073.22 ; C12.1@53200.5,53074.54 53200.5,52974.5 53250,52925 U4.2@53250,52825 ; U4.2@53250,52842.5 53250,52922.5 ; C6.2@55084.09,51648.33 55101,51563.99 ; C6.2@55084.21,51652.56 55100,51700 ; C9.1@55085.57,51450.95 55101,51534.54 ; C9.1@55100.5,51449.54 55101,51534.54 ; C9.1@55101,51450 C6.2@55101,51650 ; C9.1@55115.45,51450.77 55101,51534.54 ; C6.2@55115.79,51652.56 55100,51700 ; C6.2@55115.95,51648.7 55101,51563.99 ; R9.3@55549.85,52280.47 R9.1@55635.17,52287.47 ; R9.3@55549.85,52319.53 R9.1@55635.17,52312.53 ; R17.3@55549.85,52380.47 R17.1@55635.17,52387.47 ; R17.3@55549.85,52419.53 R17.1@55635.17,52412.53 ; R9.3@55550,52296.06 R9.1@55635.17,52287.47 ; R9.3@55550,52300 R9.1@55650,52300 ; R9.3@55550,52303.94 R9.1@55635.17,52312.53 ; R17.3@55550,52396.06 R17.1@55635.17,52387.47 ; R17.3@55550,52400 R17.1@55650,52400 ; R17.3@55550,52403.94 R17.1@55635.17,52412.53 ; R9.3@55551.42,52284.47 55635.59,52300 R9.3@55551.42,52315.53 ; R17.3@55551.42,52384.47 55635.59,52400 R17.3@55551.42,52415.53 ; R9.3@55552.97,52288.63 R9.1@55635.17,52312.53 ; R9.3@55552.97,52311.37 R9.1@55635.17,52287.47 ; R17.3@55552.97,52388.63 R17.1@55635.17,52412.53 ; R17.3@55552.97,52411.37 R17.1@55635.17,52387.47 ; pad.0@55647.78,51705.12 55560,51725 pad.0@55647.78,51744.88 ; R9.1@55648.68,52285.06 55565,52300 R9.1@55648.68,52314.94 ; R17.1@55648.68,52385.06 55565,52400 R17.1@55648.68,52414.94 ; pad.0@55650,51725 55125,51725 55100,51700 ; 52225,52750 R12.1@52300,52700 52275,52700 52225,52750 ; 55100,51700 C6.2@55100,51650 55101,51563.99
  TopLayer w50: J8.10@52000.29,51100.5 52274.5,51100.5 ; C5.2@52275,50850 52300,51035.83 ; C5.2@52279,50850 52300,50665.87 ; R12.1@52300,52700 52300,50625 52325,50600 J1.20@52400,50600 ; C13.2@54575,50650 C16.2@54575,50750 C2.2@54575,50850 C1.1@54575,51025 ; J4.3@54975,51070 54975,50900 ; J4.3@54975,51075 54975,50900 ; C14.1@54875,50850 54925,50850 ; C14.1@54875,50850 54975,50900 ; C14.1@54875,50850 54925,50850 ; 54925,50850 54975,50900
  BottomLayer w10: J4.3@54975,51100 J4.3@54975,51075 J4.3@54982.5,51075
  BottomLayer w20: J6.10@51998.4,52679.58 pad.19@52090.08,52681.87 ; J6.10@51998.62,52721.43 pad.19@52090.27,52718.18 ; J6.10@52000.29,52700 R13.1@52400,52700 ; J6.10@52002.6,52679.63 pad.19@52091.29,52700 ; J6.10@52002.82,52721.35 pad.19@52091.29,52700 ; J6.10@52006.67,52680.49 pad.19@52090.27,52718.18 ; J6.10@52006.88,52720.44 pad.19@52090.08,52681.87 ; pad.19@52097.78,52680.12 52010,52700 pad.19@52097.78,52719.88 ; pad.19@52102.22,52680.12 52190,52700 pad.19@52102.22,52719.88 ; R12.1@52298.68,52685.06 52215,52700 R12.1@52298.68,52714.94 ; R14.1@52300,53400 R15.1@52400,53400 ; R12.1@52301.32,52685.06 52385,52700 R12.1@52301.32,52714.94 ; R14.1@52301.32,53385.06 52385,53400 R14.1@52301.32,53414.94 ; R13.1@52396.53,52685.41 R12.1@52315.41,52712.43 ; R13.1@52396.53,52714.59 R12.1@52315.41,52687.57 ; R15.1@52396.53,53385.41 R14.1@52315.41,53412.43 ; R15.1@52396.53,53414.59 R14.1@52315.41,53387.57 ; R13.1@52398.68,52685.06 52315,52700 R13.1@52398.68,52714.94 ; R15.1@52398.68,53385.06 52315,53400 R15.1@52398.68,53414.94 ; R13.1@52400.87,52685.03 R12.1@52315.41,52687.57 ; R13.1@52400.87,52714.97 R12.1@52315.41,52712.43 ; R15.1@52400.87,53385.03 R14.1@52315.41,53387.57 ; R15.1@52400.87,53414.97 R14.1@52315.41,53412.43 ; R15.1@52401.32,53385.06 52485,53400 R15.1@52401.32,53414.94 ; U2.1@52482.59,53301.75 52500,53387.5 U2.1@52517.41,53301.75 ; U2.1@52500,53300 52500,53400 ; C10.1@52998.13,53384.57 52914.53,53400 ; C10.1@52998.3,53414.45 52914.53,53400 ; Rp1.3@53000,53100 53175,53100 C12.1@53200.5,53074.54 ; C10.1@53000.77,53414.45 53084.54,53400 ; C10.1@53000.95,53384.57 53084.54,53400 ; Rp1.3@53005,53100 53100,53100 ; Rp1.3@53008.29,53075.22 53100,53100 ; Rp1.3@53008.29,53124.78 53100,53100 ; 53099.5,53100.5 53099.5,53399.5 ; C12.1@53196.07,53060.21 53092.71,53100 ; C12.1@53200.5,53074.54 53092.71,53100 ; C12.1@53202.95,53089.34 53092.71,53100 ; C4.2@53223.51,53384.07 53139,53400 C4.2@53223.51,53415.93 ; C4.2@53226.49,53384.07 53311,53400 C4.2@53226.49,53415.93 ; pad.0@53397.78,53380.12 53310,53400 pad.0@53397.78,53419.88 ; pad.0@53398.25,53380.08 pad.1@53488.91,53382.13 ; pad.0@53398.25,53419.92 pad.1@53488.91,53417.87 ; pad.0@53402.22,53380.12 53490,53400 pad.0@53402.22,53419.88 ; pad.0@53406.08,53380.95 pad.1@53488.91,53417.87 ; pad.0@53406.08,53419.05 pad.1@53488.91,53382.13 ; pad.1@53497.78,53380.12 53410,53400 pad.1@53497.78,53419.88 ; pad.1@53498.25,53380.08 pad.2@53588.91,53382.13 ; pad.1@53498.25,53419.92 pad.2@53588.91,53417.87 ; pad.1@53502.22,53380.12 53590,53400 pad.1@53502.22,53419.88 ; pad.1@53506.08,53380.95 pad.2@53588.91,53417.87 ; pad.1@53506.08,53419.05 pad.2@53588.91,53382.13 ; pad.2@53597.78,53380.12 53510,53400 pad.2@53597.78,53419.88 ; pad.2@53600,53400 pad.1@53500,53400 ; 53975,50425 53975,50575 ; 53975,50550 53975,50575 ; v1(53975,50875) 53975,50575 ; J6.10@52000.29,52700.5 pad.19@52091.29,52700 ; J6.10@52000.29,52700.5 pad.19@52090.27,52718.18 ; J6.10@52000.29,52700.5 pad.19@52090.08,52681.87 ; R12.1@52315.41,52687.57 R13.1@52400,52700 ; R12.1@52315.41,52712.43 R13.1@52400,52700 ; R14.1@52315.41,53387.57 R15.1@52400,53400 ; R14.1@52315.41,53412.43 R15.1@52400,53400 ; R15.1@52400,53400 52500,53400 ; 52500,53400 C4.2@53225,53400 pad.0@53400,53400 ; 52914.53,53400 C10.1@52999.54,53399.5 53084.54,53400 ; pad.0@53400,53400 pad.1@53488.91,53417.87 ; pad.0@53400,53400 pad.1@53488.91,53382.13 ; pad.0@53400,53400 pad.1@53500,53400 ; pad.1@53500,53400 pad.2@53588.91,53417.87 ; pad.1@53500,53400 pad.2@53588.91,53382.13
  BottomLayer w50: Sp1.1@52150,50150 pad.12@52150,50300 ; Sp1.1@52150.09,50149.67 pad.12@52150,50300 ; D7.2@52625,50350 52625,50425 ; C13.2@54575,50650 54575,50450 54550,50425 53975,50425 52625,50425 ; J4.3@54975,51075 55132.5,51082.5 ; J4.3@54982.5,51082.5 55132.5,51082.5 ; C9.1@55100.5,51449.54 55115,51267.97 ; 55115,51100 C9.1@55115,51435.04 ; J10.4@55205,50900 55205,50990 ; J3.4@55299.21,50475 55550,50475 55625,50475 ; J3.4@55312.8,50461.42 55495.81,50475 ; 55365.68,50475 55550,50454 55625,50475 ; R16.2@55550,51250 55650,51250 ; 55650,50825 55650,50500 55625,50475 ; 55650,50832.95 55650,51000 ; 55650,51796.29 pad.1@55600,52000 ; 55650,51895.08 pad.0@55600,52100 ; R17.1@55650,52400 R9.1@55650,52300 ; pad.12@52150,50300 pad.11@52150,50400 pad.10@52150,50500 C7.1@52150,50600 J1.20@52400,50600 ; J1.20@52400,50600 U1.20@52500,50600 ; J1.20@52400,50600 U1.20@52500,50600 ; U1.20@52500,50600 52500,50450 52525,50425 52625,50425 ; C3.2@54700,50850 54579,50850 C3.2@54725,50850 ; C3.2@54700,50850 C14.1@54875,50850 C3.2@54725,50850 ; C3.2@54700,50850 C2.2@54575,50850 C3.2@54725,50850 ; 55132.5,51082.5 55215,51000 55650,51000 ; pad.3@55600,51800 pad.1@55600,52000 ; pad.3@55600,51800 pad.2@55600,51900 ; pad.3@55600,51800 pad.0@55650,51725 ; pad.3@55600,51800 55650,52005.76 ; pad.2@55600,51900 pad.0@55600,52100 ; pad.2@55600,51900 pad.1@55600,52000 ; pad.2@55600,51900 pad.1@55600,52000 ; pad.2@55600,51900 55650,52005.76 ; pad.2@55600,51900 pad.0@55650,51725 ; pad.2@55600,51900 55650,52105.13 ; pad.1@55600,52000 pad.0@55600,52100 ; pad.1@55600,52000 pad.0@55600,52100 ; pad.1@55600,52000 55650,52005.76 ; pad.1@55600,52000 55650,52105.13 ; pad.1@55600,52000 55650,52005.76 ; pad.1@55600,52000 pad.4@55600,52200 ; pad.1@55600,52000 55650,51994.37 ; pad.1@55600,52000 55650,52204.08 pad.0@55600,52100 ; pad.0@55600,52100 55650,52105.13 ; pad.0@55600,52100 pad.4@55600,52200 ; pad.0@55600,52100 55650,51994.37 ; pad.0@55600,52100 55650,52105.13 ; pad.0@55600,52100 R9.1@55650,52300 ; pad.4@55600,52200 55650,51994.37 ; pad.4@55600,52200 R9.1@55650,52300 ; 55650,51000 55650,51250 ; 55650,51250 pad.0@55650,51725 ; pad.0@55650,51725 R9.1@55650,52300
NetC13_1: C13.1 CYC1.2 U3.7 | length 1377
  TopLayer w10: CYC1.2@54050.45,50700.07 54107.95,50700 ; CYC1.2@54050.52,50700 54150,50700 ; CYC1.2@54051.79,50687.64 54107.95,50700 ; CYC1.2@54051.82,50712.49 54107.95,50700 ; CYC1.2@54054.83,50678 54107.95,50700 ; CYC1.2@54054.88,50722.13 54107.95,50700 ; U3.7@54266.56,50859.48 54275,50825 ; U3.7@54275,50860.5 54275,50825 ; U3.7@54275,50906 54275,50825 ; U3.7@54283.44,50859.48 54275,50825 ; C13.1@54467.06,50629.37 54415,50650 ; C13.1@54467.06,50670.63 54415,50650 ; C13.1@54469.92,50639.05 54415,50650 ; C13.1@54469.92,50660.95 54415,50650 ; C13.1@54471,50650 54415,50650 ; C13.1@54475,50650 54200,50650 54150,50700 ; 54150,50700 54275,50825
NetC16_1: C16.1 CYC1.1 U3.8 | length 1128.6
  TopLayer w10: CYC1.1@54242.48,50721.11 54309.47,50734.47 ; CYC1.1@54245.17,50711.4 54309.47,50734.47 ; CYC1.1@54250.45,50700.07 54309.47,50734.47 ; CYC1.1@54257.71,50689.89 54309.47,50734.47 ; CYC1.1@54264.83,50682.76 54309.47,50734.47 ; CYC1.1@54275.07,50700.07 54325,50750 ; U3.8@54316.54,50859.67 54325,50817 ; U3.8@54325,50860.5 54325,50817 ; U3.8@54325,50906 54325,50750 ; U3.8@54333.46,50859.67 54325,50817 ; C16.1@54467.06,50729.37 54415,50750 ; C16.1@54467.06,50770.63 54415,50750 ; C16.1@54469.92,50739.05 54415,50750 ; C16.1@54469.92,50760.95 54415,50750 ; C16.1@54471,50750 54415,50750 ; C16.1@54475,50750 54325,50750
NetC17_1: C17.1 J3.1 J10.1 L1.1 | length 2077.8
  TopLayer w50: 55050,50645.04 J3.1@55037.2,50461.42 55050,50500 55050,50850 ; C17.1@55550,50554 55550,50675 ; C17.1@55550,50575 55550,50675 ; 55550,50625 55550,50675 ; L1.1@55550,51175 55550,50975 ; 55050,50850 J10.1@55125,50900 55175,50975 ; 55050,50850 55175,50975 ; 55175,50975 55550,50975 ; 55550,50675 55550,50975
NetD1_1: D1.1 Q1.2 | length 826.4
  BottomLayer w10: D1.1@53600,51850 53661,51849.31 ; D1.1@53600.23,51844 53661,51849.31 ; D1.1@53600.36,51855.99 53661,51849.31 ; D1.1@53601,51849.31 53724.31,51849.31 Q1.2@53725,51850 53669.99,51849.31 ; D1.1@53601.92,51834.12 53661,51849.31 ; D1.1@53602.28,51865.84 53661,51849.31 ; D1.1@53605.25,51824.54 53661,51849.31 ; D1.1@53605.83,51875.34 53661,51849.31 ; Q1.2@53721.12,51869.62 53669.99,51849.31 ; Q1.2@53721.61,51830.29 53669.99,51849.31 ; Q1.2@53723.97,51859.95 53669.99,51849.31 ; Q1.2@53724.22,51840.03 53669.99,51849.31
NetD1_2: D1.2 R1.2 R1.4 | length 984.4
  TopLayer w10: R1.2@53500,51650 R1.4@53600,51650 ; R1.2@53500.91,51640.04 53555,51650 ; R1.2@53500.91,51659.96 53555,51650 ; R1.2@53503.64,51630.33 53555,51650 ; R1.2@53503.64,51669.67 53555,51650 ; R1.4@53596.19,51629.77 53544.41,51650 ; R1.4@53596.19,51670.23 53544.41,51650 ; R1.4@53598.99,51639.46 53544.41,51650 ; R1.4@53598.99,51660.54 53544.41,51650
  BottomLayer w30: D1.2@53484.04,51848.94 53500,51729 D1.2@53515.96,51848.94 ; R1.2@53500,51650 D1.2@53500,51850
NetD2_1: D2.1 Q2.2 | length 826.4
  BottomLayer w10: D2.1@54000,51850 54061,51849.31 ; D2.1@54000.23,51844 54061,51849.31 ; D2.1@54000.36,51855.99 54061,51849.31 ; D2.1@54001,51849.31 54124.31,51849.31 Q2.2@54125,51850 54069.99,51849.31 ; D2.1@54001.92,51834.12 54061,51849.31 ; D2.1@54002.28,51865.84 54061,51849.31 ; D2.1@54005.25,51824.54 54061,51849.31 ; D2.1@54005.83,51875.34 54061,51849.31 ; Q2.2@54121.12,51869.62 54069.99,51849.31 ; Q2.2@54121.61,51830.29 54069.99,51849.31 ; Q2.2@54123.97,51859.95 54069.99,51849.31 ; Q2.2@54124.22,51840.03 54069.99,51849.31
NetD2_2: D2.2 R2.2 R2.4 | length 984.4
  TopLayer w10: R2.2@53900,51650 R2.4@54000,51650 ; R2.2@53900.91,51640.04 53955,51650 ; R2.2@53900.91,51659.96 53955,51650 ; R2.2@53903.64,51630.33 53955,51650 ; R2.2@53903.64,51669.67 53955,51650 ; R2.4@53996.19,51629.77 53944.41,51650 ; R2.4@53996.19,51670.23 53944.41,51650 ; R2.4@53998.99,51639.46 53944.41,51650 ; R2.4@53998.99,51660.54 53944.41,51650
  TopLayer w30: D2.2@53884.04,51848.94 53900,51729 D2.2@53915.96,51848.94 ; R2.2@53900,51650 D2.2@53900,51850
NetD3_1: D3.1 Q3.2 | length 826.4
  BottomLayer w10: D3.1@54400,51850 54461,51849.31 ; D3.1@54400.23,51844 54461,51849.31 ; D3.1@54400.36,51855.99 54461,51849.31 ; D3.1@54401,51849.31 54524.31,51849.31 Q3.2@54525,51850 54469.99,51849.31 ; D3.1@54401.92,51834.12 54461,51849.31 ; D3.1@54402.28,51865.84 54461,51849.31 ; D3.1@54405.25,51824.54 54461,51849.31 ; D3.1@54405.83,51875.34 54461,51849.31 ; Q3.2@54521.12,51869.62 54469.99,51849.31 ; Q3.2@54521.61,51830.29 54469.99,51849.31 ; Q3.2@54523.97,51859.95 54469.99,51849.31 ; Q3.2@54524.22,51840.03 54469.99,51849.31
NetD3_2: D3.2 R3.2 R3.4 | length 984.4
  TopLayer w10: R3.2@54300,51650 R3.4@54400,51650 ; R3.2@54300.91,51640.04 54355,51650 ; R3.2@54300.91,51659.96 54355,51650 ; R3.2@54303.64,51630.33 54355,51650 ; R3.2@54303.64,51669.67 54355,51650 ; R3.4@54396.19,51629.77 54344.41,51650 ; R3.4@54396.19,51670.23 54344.41,51650 ; R3.4@54398.99,51639.46 54344.41,51650 ; R3.4@54398.99,51660.54 54344.41,51650
  TopLayer w30: D3.2@54284.04,51848.94 54300,51729 D3.2@54315.96,51848.94 ; R3.2@54300,51650 D3.2@54300,51850
NetD4_1: D4.1 Q4.2 | length 826.4
  BottomLayer w10: D4.1@54800,51850 54861,51849.31 ; D4.1@54800.23,51844 54861,51849.31 ; D4.1@54800.36,51855.99 54861,51849.31 ; D4.1@54801,51849.31 54924.31,51849.31 Q4.2@54925,51850 54869.99,51849.31 ; D4.1@54801.92,51834.12 54861,51849.31 ; D4.1@54802.28,51865.84 54861,51849.31 ; D4.1@54805.25,51824.54 54861,51849.31 ; D4.1@54805.83,51875.34 54861,51849.31 ; Q4.2@54921.12,51869.62 54869.99,51849.31 ; Q4.2@54921.61,51830.29 54869.99,51849.31 ; Q4.2@54923.97,51859.95 54869.99,51849.31 ; Q4.2@54924.22,51840.03 54869.99,51849.31